# Altium PCB Rajesh_Jasti_17978253_Lab1.PcbDoc
Units mil, origin at the board's own origin, x right, y up, seen from the top; angles counter-clockwise.
Board outline 2500 x 2000 mil, 2 copper layers (Top Layer, Bottom Layer); 41 components, 29 nets, 143 pads, 6 vias.
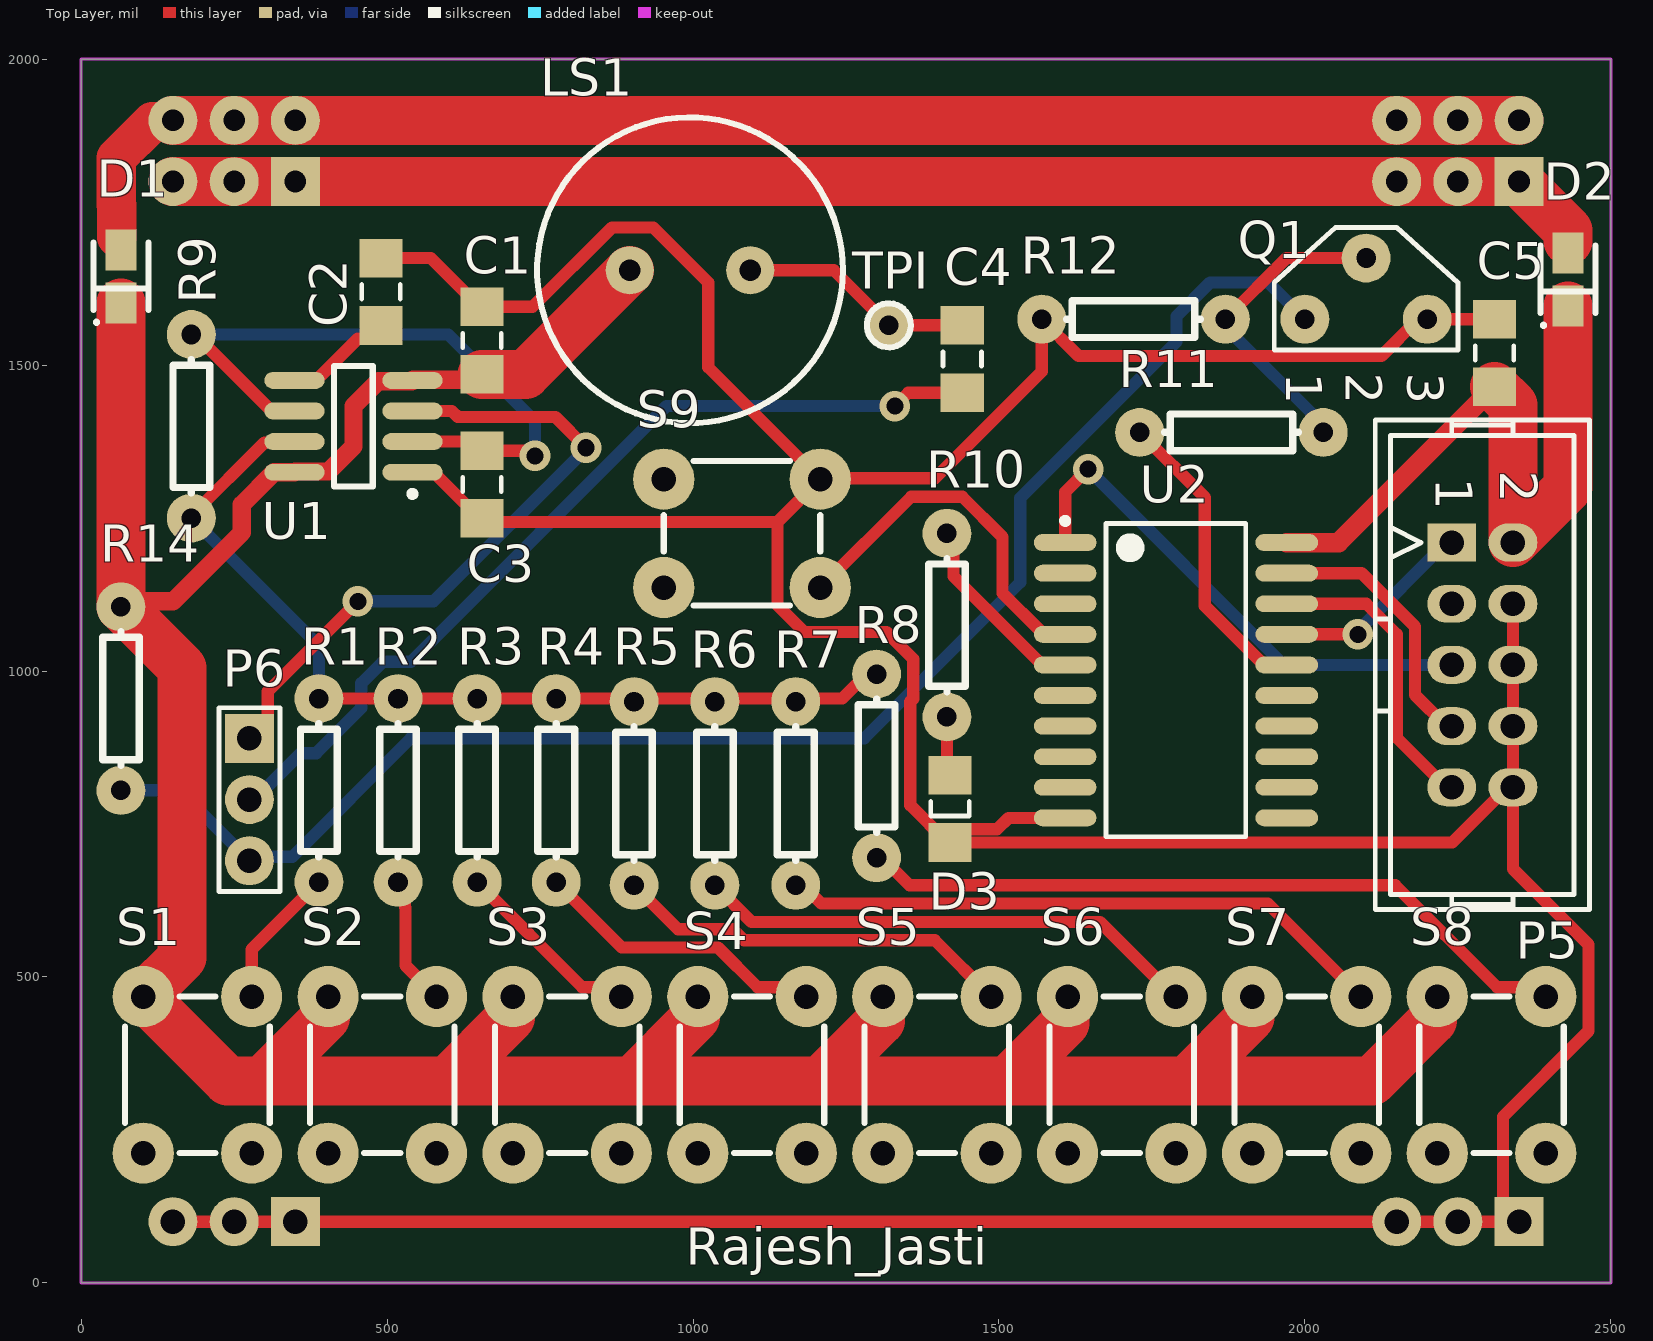
[diagram p0: Top Layer view]
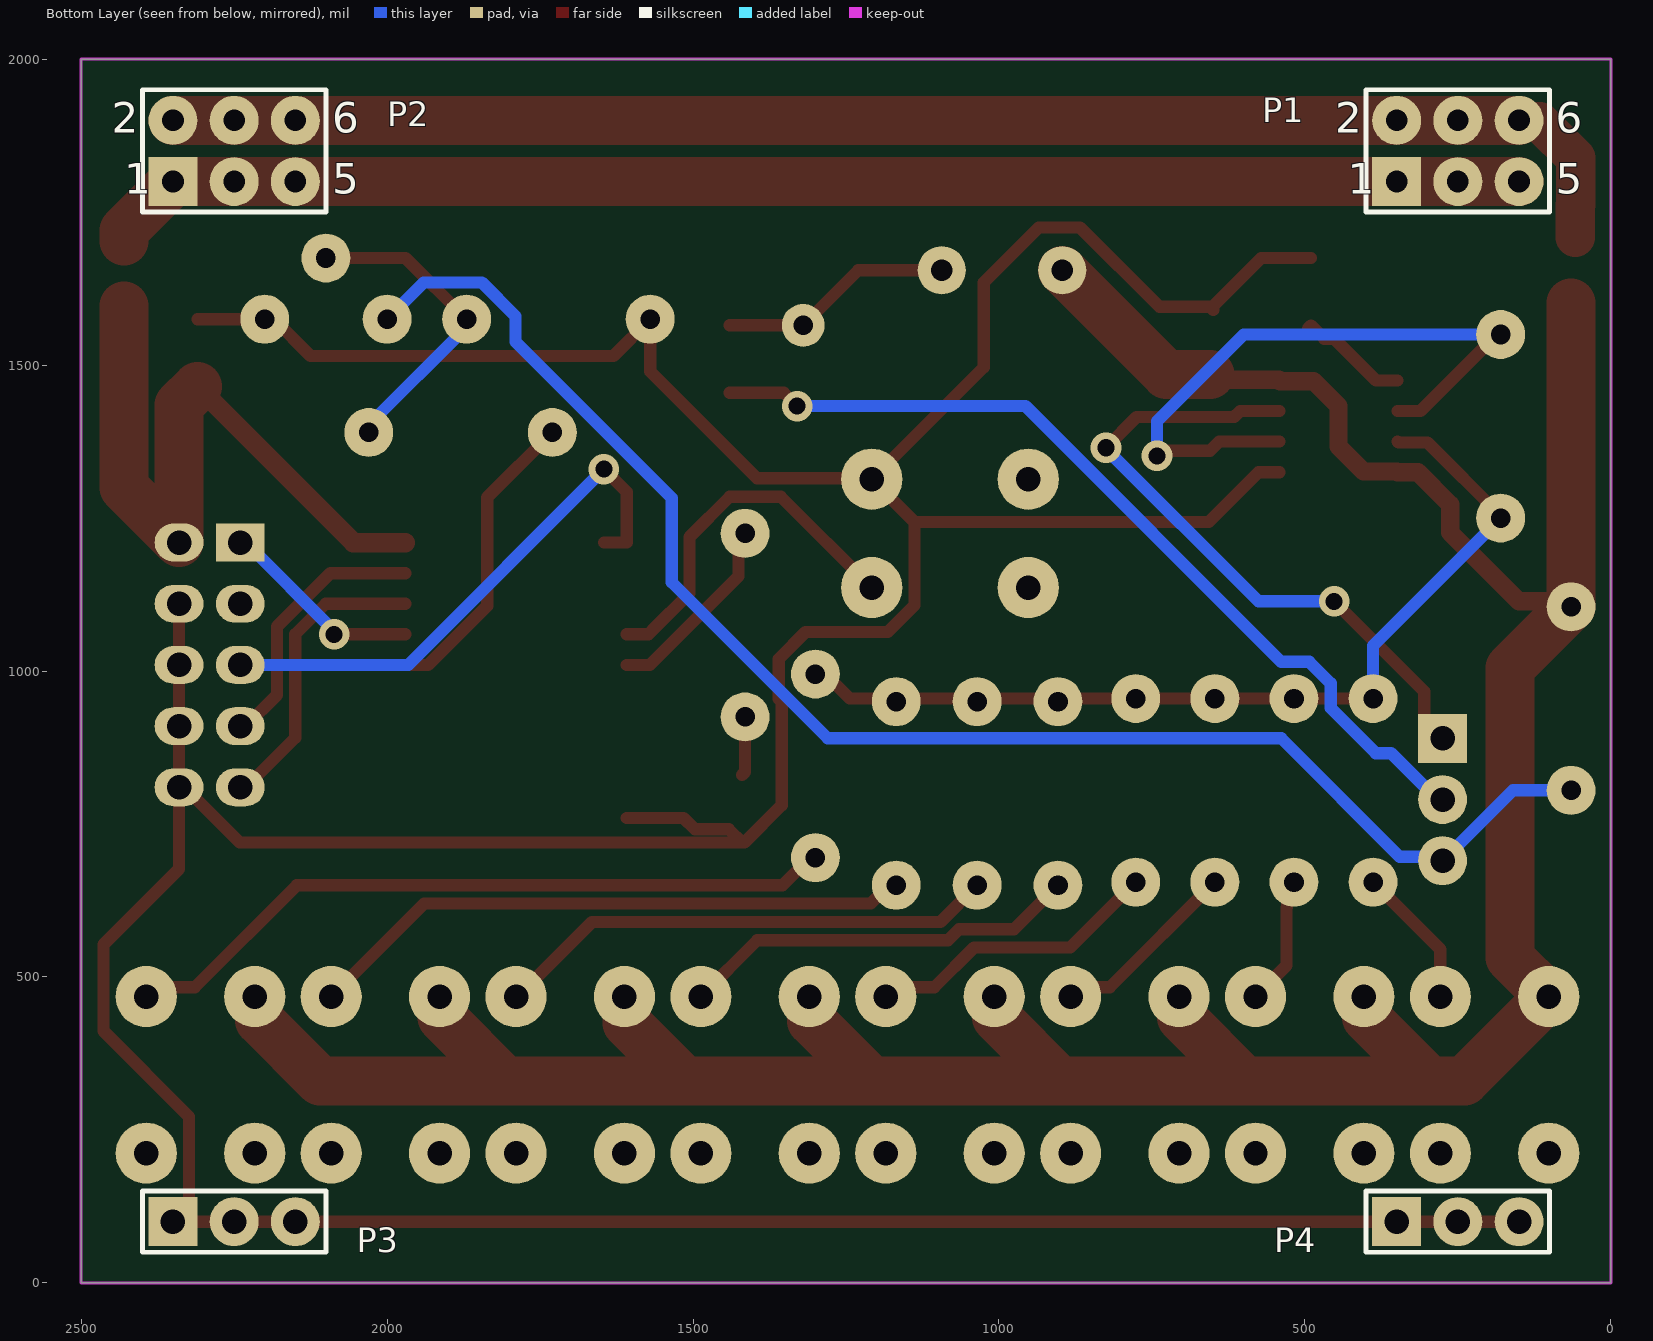
[diagram p1: Bottom Layer view, seen from below]
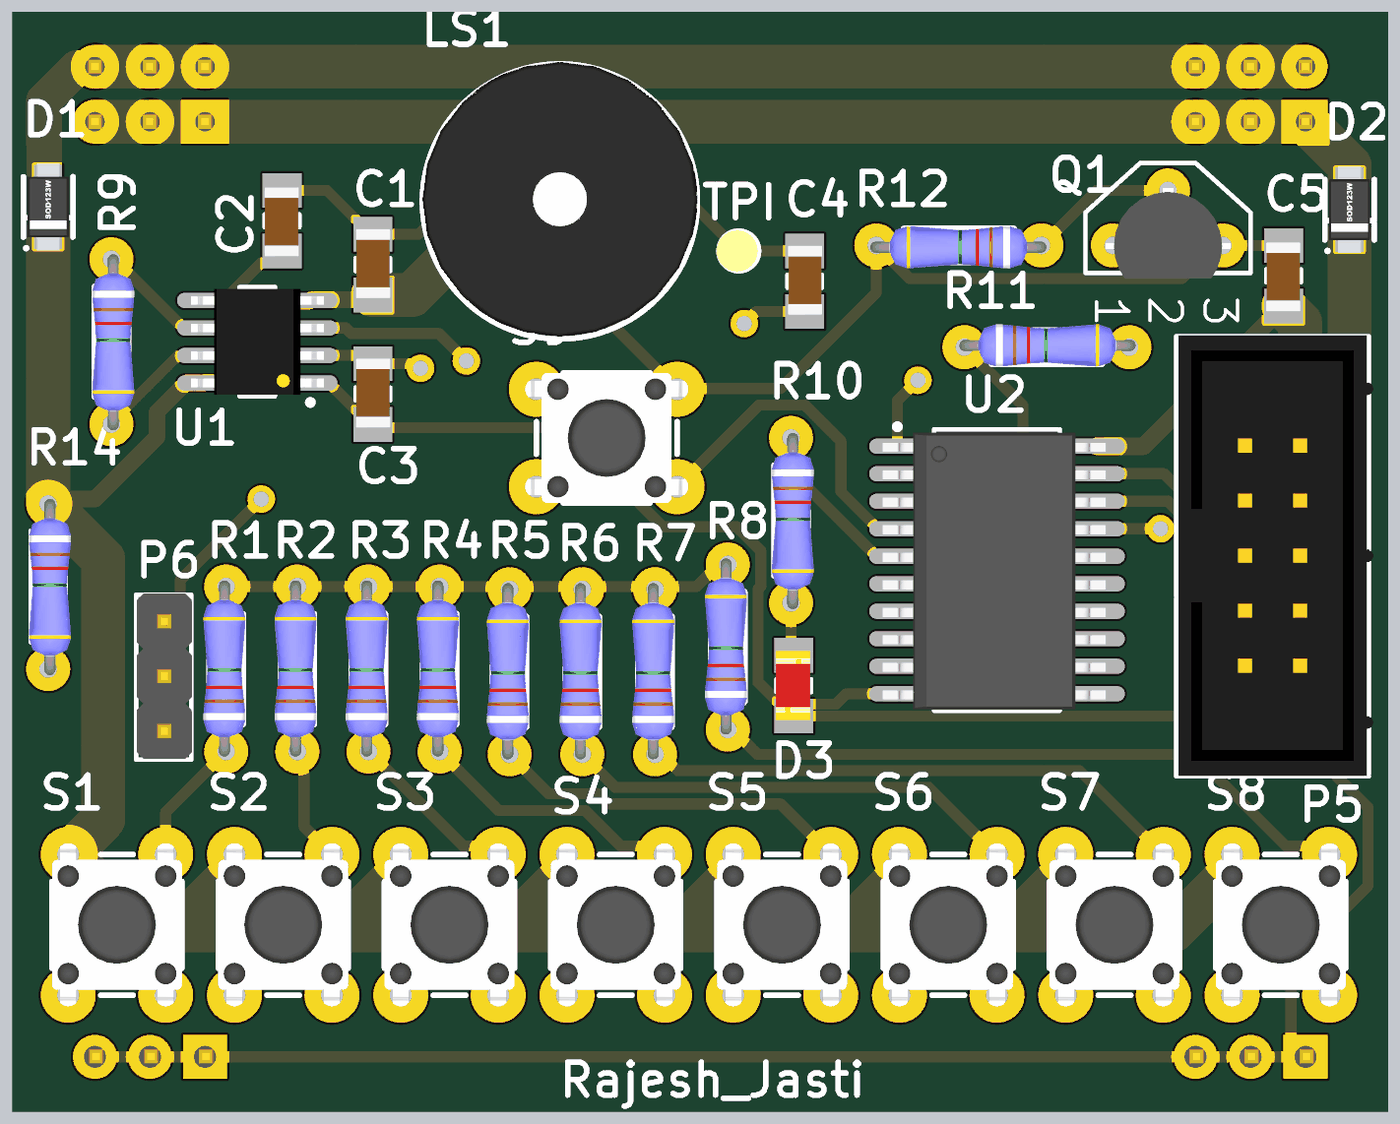
[diagram p2: 3D render of the assembled board from above, using the file's embedded part models]
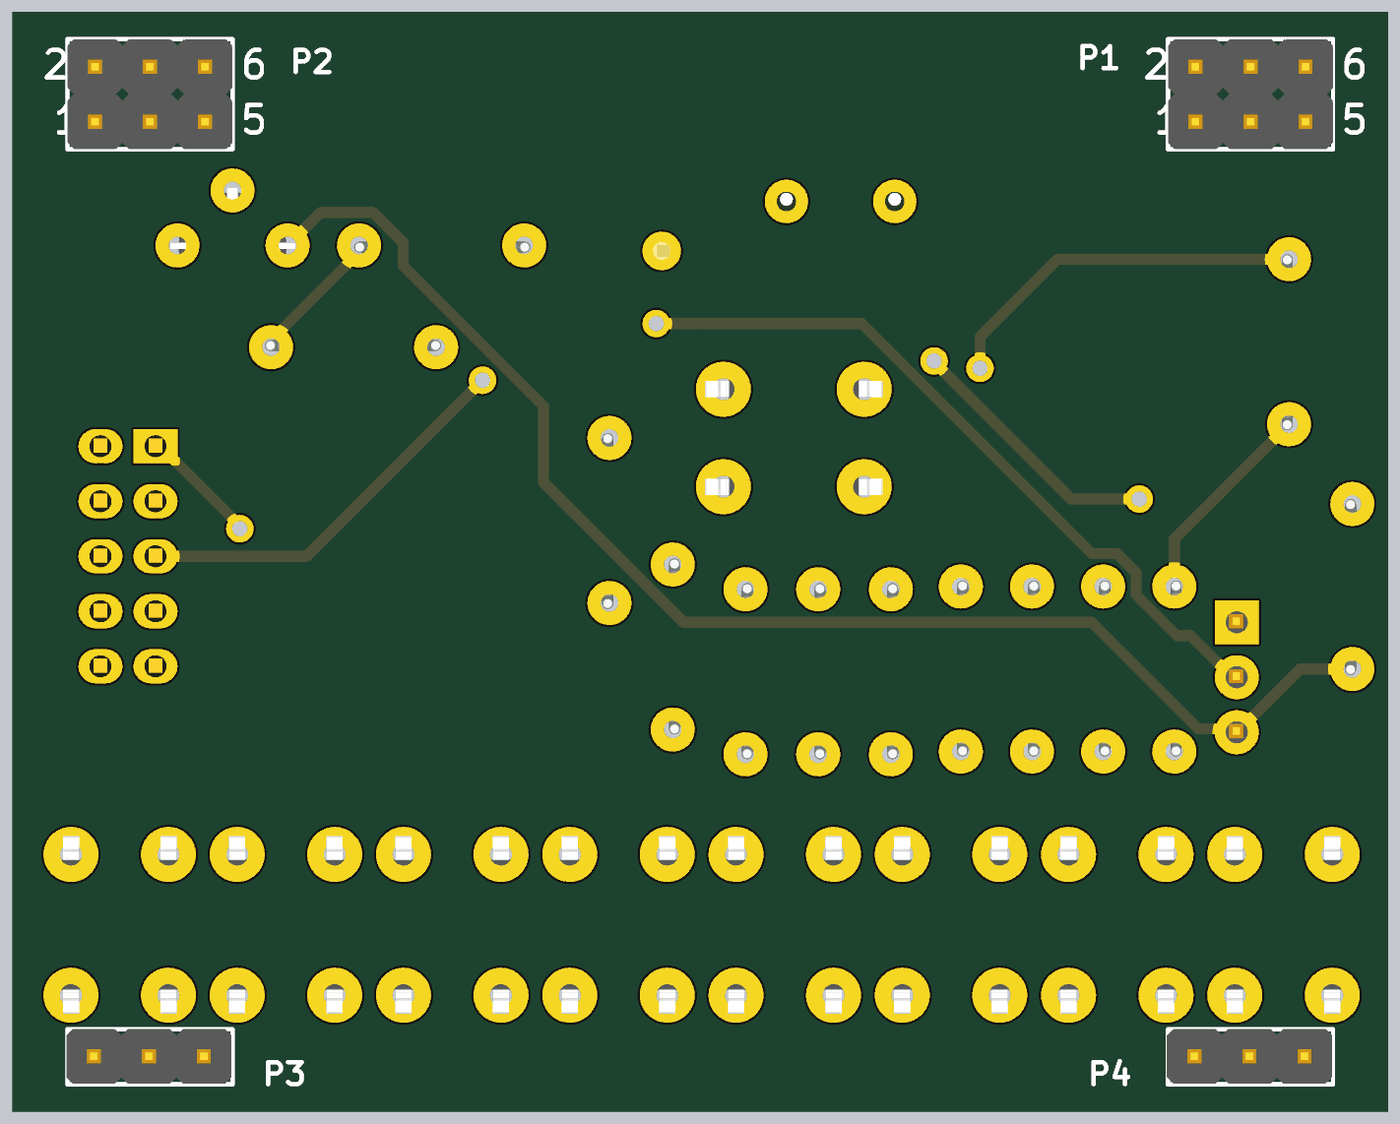
[diagram p3: 3D render of the assembled board from below, using the file's embedded part models]

## Layer stack, top to bottom
Top Solder: solder mask 0.4, Solder Resist, Dk 3.5
Top Layer: signal copper 1.4
Dielectric 1: dielectric 12.6, FR-4, Dk 4.8
Bottom Layer: signal copper 1.4
Bottom Solder: solder mask 0.4, Solder Resist, Dk 3.5

## Board outline
0,0 2500,0 2500,2000 0,2000

## Design rules (kind name [scope] priority, off if disabled: settings)
Clearance "Schematic Clearance Constraint_3" [InNet('+5')] p1: gap=20 ignorepadtopadclearanceinfootprint=FALSE
Clearance "Schematic Clearance Constraint_2" [InNet('+12')] p2: gap=20 ignorepadtopadclearanceinfootprint=FALSE
Clearance "Schematic Clearance Constraint_1" [InNet('+5Vin')] p3: gap=20 ignorepadtopadclearanceinfootprint=FALSE
Clearance "Schematic Clearance Constraint" [InNet('+12Vin')] p4: gap=20 ignorepadtopadclearanceinfootprint=FALSE
Clearance [All] p5: gap=10 ignorepadtopadclearanceinfootprint=FALSE
PolygonConnect [All] p1: connectstyle=Relief reliefconductorwidth=10 reliefentries=4 polygonreliefangle="90 Angle" airgapwidth=10
RoutingVias "Schematic Routing Via Style_3" [InNet('+12Vin')] p1: holewidth=28 width=50 viastyle="Through Hole" minholewidth=28 minwidth=50 maxholewidth=28 maxwidth=50
RoutingVias "Schematic Routing Via Style_2" [InNet('+12')] p2: holewidth=28 width=50 viastyle="Through Hole" minholewidth=28 minwidth=50 maxholewidth=28 maxwidth=50
RoutingVias "Schematic Routing Via Style_1" [InNet('+5Vin')] p3: holewidth=28 width=50 viastyle="Through Hole" minholewidth=28 minwidth=50 maxholewidth=28 maxwidth=50
RoutingVias "Schematic Routing Via Style" [InNet('+5')] p4: holewidth=28 width=50 viastyle="Through Hole" minholewidth=28 minwidth=50 maxholewidth=28 maxwidth=50
RoutingVias [All] p5: holewidth=28 width=50 viastyle="Through Hole" minholewidth=28 minwidth=50 maxholewidth=28 maxwidth=50
SilkToSilkClearance [All] p1 off: silktosilkclearance=10
SilkToSolderMaskClearance [IsPad] p1 off: minsilkscreentomaskgap=10 clearancetoexposedcopper=TRUE
SolderMaskExpansion [All] p1: expansion=4 istentingtop=FALSE
Width "Schematic Width Constraint_3" [InNet('+12Vin')] p1: maxlimit=80 minlimit=30 preferedwidth=80
Width "Schematic Width Constraint_2" [InNet('+5')] p2: maxlimit=80 minlimit=30 preferedwidth=80
Width "Schematic Width Constraint_1" [InNet('+5Vin')] p3: maxlimit=80 minlimit=30 preferedwidth=80
Width "Schematic Width Constraint" [InNet('+12')] p4: maxlimit=80 minlimit=30 preferedwidth=80
Width [All] p5: maxlimit=20 minlimit=20 preferedwidth=20
28 further rules are at their usual default settings.

## Components (designator, comment, footprint, x,y, rotation, side; value= is the part's Value field where it differs from the comment)
C1 "0.1uF" CAP_1206 655,1485 r90 top
C2 "10nF" CAP_1206 490,1675 r270 top
C3 "0.1uF" CAP_1206 655,1249.76 r90 top
C4 "4.7uF" CAP_1206 1439.97,1454.76 r90 top
C5 "0.1uF" CAP_1206 2310,1575 r270 top
D1 "PMEG2010ER" SOD123W 65,1645 r90 top
D2 "PMEG2010ER" SOD123W 2430,1640 r90 top
D3 "LED-RED" LED1206R 1420,830 r270 top
LS1 "Buzzer" Buzzer 995,1655 r0 top
P1 "+5V/+12V" HDR2X3_AUT 350,1800 r180 bottom locked
P2 "+5V/+12V" HDR2X3_AUT 2350,1800 r180 bottom locked
P3 "Gnd" HDR1X3_AUT 2350,100 r180 bottom locked
P4 "Gnd" HDR1X3_AUT 350,100 r180 bottom locked
P5 "ISP Header" FKV10SN_AUT 2240,1210 r270 top
P6 "Jumper" HDR1X3_AUT 275,890 r270 top
Q1 "BC546B" TO-92AUT 2100,1575 r270 top
R1 "14K" AXIAL-0.3AUT 388.54,955 r270 top
R2 "11K" AXIAL-0.3AUT 517.83,955 r270 top
R3 "8K2" AXIAL-0.3AUT 647.11,955 r270 top
R4 "7K" AXIAL-0.3AUT 776.4,955 r270 top
R5 "4K8" AXIAL-0.3AUT 903.54,950 r270 top
R6 "2K8" AXIAL-0.3AUT 1035.7,950 r270 top
R7 "980" AXIAL-0.3AUT 1167.85,950 r270 top
R8 "150" AXIAL-0.3AUT 1300,995 r270 top
R9 "6K8" AXIAL-0.3AUT 180,1250 r90 top
R10 "330R" AXIAL-0.3AUT 1415,925 r90 top
R11 "1K" AXIAL-0.3AUT 2030,1390 r180 top
R12 "10K" AXIAL-0.3AUT 1570,1575 r0 top
R14 "1K" AXIAL-0.3AUT 65,805 r90 top
S1 "FSM10JH" FSM10JH 190,340 r180 top
S2 "FSM10JH" FSM10JH 492.14,340 r180 top
S3 "FSM10JH" FSM10JH 794.29,340 r180 top
S4 "FSM10JH" FSM10JH 1096.43,340 r180 top
S5 "FSM10JH" FSM10JH 1398.57,340 r180 top
S6 "FSM10JH" FSM10JH 1700.71,340 r180 top
S7 "FSM10JH" FSM10JH 2002.86,340 r180 top
S8 "FSM10JH" FSM10JH 2305,340 r180 top
S9 "FSM10JH" FSM10JH 1080,1225 r90 top
TPI "Test Point" PAD1_AUT 1320,1565 r0 top
U1 "NE555D" SO8_M 445,1400 r90 top
U2 "ATtiny2313A-SU" 20S_M 1789.3,985 r0 top

## Footprints (in the part's own frame and the unit in brackets; to place one, negate y for a bottom-side part, rotate by r counter-clockwise, add the part's x,y. Pads: shape width x height; smd on the part's side, far side on the other; paste and mask are expansions set on the pad)
20S_M [mm] "SOIC, 20-Leads, Body 12.8x7.5mm, Pitch 1.27mm, IPC Low Density"
  oval 2.6x0.7 smd: 1(-4.6,5.715) 2(-4.6,4.445) 3(-4.6,3.175) 4(-4.6,1.905) 5(-4.6,0.635) 6(-4.6,-0.635) 7(-4.6,-1.905) 8(-4.6,-3.175) 9(-4.6,-4.445) 10(-4.6,-5.715) 11(4.6,-5.715) 12(4.6,-4.445) 13(4.6,-3.175) 14(4.6,-1.905) 15(4.6,-0.635) 16(4.6,0.635) 17(4.6,1.905) 18(4.6,3.175) 19(4.6,4.445) 20(4.6,5.715)
  silkscreen extent -4.72,-6.5 2.9,6.74, body extent -5.28,-6.45 5.02,6.35, height 2.65
AXIAL-0.3AUT [mil] "2 leads, Distance 300mil. For AUT Manufacture"
  round 80 hole 32: 1(0,0) 2(300,0)
  silkscreen extent 41,-30 259,30, body extent -11,-41 309,35, height 79
Buzzer [mm] "PIEZO BUZZER, Pitch 5mm, Dia 12.7mm"
  round 2 hole 0.9: 1(-2.5,0) 2(2.5,0)
  silkscreen extent -6.35,-6.35 6.35,6.35, body extent -6.35,-6.25 6.35,6.45, height 6.8
CAP_1206 [mm] "Body 3.2 x 1.6 mm (LxW typ)"
  rect 1.6x1.8 smd: 1(0,0) 2(2.8,0)
  silkscreen extent 1.1,-0.8 1.7,0.8, body extent -0.15,-0.81 3.05,0.79, height 1.6
FKV10SN_AUT [mil] "Box Headers; 10 Position; Dual Line; Pitch, 100 mil"
  rect 62x80 hole 40: 1(0,0)
  oval 62x80 hole 40: 2(0,100) 3(100,0) 4(100,100) 5(200,0) 6(200,100) 7(300,0) 8(300,100) 9(400,0) 10(400,100)
  silkscreen extent -200,-125 600,225, body extent -202,-121 599,233, height 355
FSM10JH [mm] "Switch, 4 Leads, Pitch 6.5x4.5mm"
  round 2.54 hole 1.016: 0(-2.25,3.25) 0(2.25,3.25) 1(-2.25,-3.25) 2(2.25,-3.25)
  silkscreen extent -3,-3.25 3,3.25, body extent -3,-4.11 3,4.11, height 7.4
HDR1X3_AUT [mil] "Connector; Header; 3 Position; Pitch 2.54mm, Straight"
  rect 80x80 hole 40: 1(0,0)
  round 80 hole 40: 2(100,0) 3(200,0)
  silkscreen extent -50,-50 250,50, body extent -52,-49 248,51, height 398
HDR2X3_AUT [mil] "Connector; Header; 3x2 Position"
  rect 80x80 hole 35.43: 1(0,0)
  round 80 hole 35.43: 2(0,100) 3(100,0) 4(100,100) 5(200,0) 6(200,100)
  silkscreen extent -50,-50 250,150, body extent -50,-50 250,150, height 398
LED1206R [mm] "SMD; Red LED; Body 3.2 x 1.6 mm"
  rect 1.6x1.8 smd: A(0,0) K(2.8,0)
  silkscreen extent 1.1,-0.8 1.7,0.8, body extent -0.2,-0.84 3,0.76, height 1.09
PAD1_AUT [mil] "Teminal Pad; 70 x 70 mil; Hole, 32mil"
  round 70 hole 32: 1(0,0)
  silkscreen extent -36,-36 36,36, body extent -40,-37 34,37, height 319
SO8_M [mm] "SOIC, 8-Leads, Body 4.9x3.9mm, Pitch 1.27mm, IPC Low Density"
  oval 0.7x2.5 smd: 1(-1.905,-2.45) 2(-0.635,-2.45) 3(0.635,-2.45) 4(1.905,-2.45) 5(1.905,2.45) 6(0.635,2.45) 7(-0.635,2.45) 8(-1.905,2.45)
  silkscreen extent -2.93,-2.58 2.5,0.8, body extent -2.44,-3.07 2.45,3.07, height 1.76
SOD123W [mm] "SOD, 2-Leads, Body 1.70x3.50mm, IPC Medium Density"
  rect 1.7x1.3 smd: 1(-1.1,0) 2(1.1,0)
  silkscreen extent -1.95,-1.14 1.4,1.14, body extent -2,-0.95 2,0.95, height 2.2
TO-92AUT [mil] "TO, Flat Index; Transistor; In-Line, Axial Leads; For AUT Manufacture"
  round 80 hole 32: 1(0,-100) 2(-100,0) 3(0,100)
  silkscreen extent -150,-150 50,150, body extent -105,-114 60,114, height 295

## Part data
C1 C2 C3 C4 C5: library part "CAPN 1206", "Non Polarized Capacitor, SMD, 1206"
D1 D2: "Schottky REC, 20V, 1A, 340mV, SMD SOD123W", Supplier Part Number 1=1907681, Supplier 1=Element14
D3: library part "SMD 1206 LED-RED", "RED LED, Case 1206", Supplier Part Number 1=8530017, Supplier 1=Farnell
LS1: "Magnetic Transducer Buzzer", Supplier Part Number 1=1756516, Supplier 1=Farnell
P1 P2: library part HDR3X2, "Header, 3-Pin, Dual row, 2.54mm Pitch, Straight", Supplier Part Number 1=9733574, Supplier 1=Farnell
P3 P4 P6: library part HDR1X3V, "Header, Plug, 2.54mm, 3 Pins, Straight", Supplier Part Number 1=9731083, Supplier 1=Farnell
P5: library part "Box Header 5X2/S", "Header, Box, 10 Way, 2.54mm, Straght", Supplier Part Number 1=8395918, Supplier 1=Farnell
Q1: "NPN Bipolar Transistor; 65V, 100mA", Supplier Part Number 1=512-BC546BTA, Supplier 1=Mouser
R1 R2 R3 R4 R5 R6 R7 R8 R9 R10 R11 R12 R14: library part "Resistor 1/8W", "Resistor, Through Hole, Pitch 300mil"
S1 S2 S3 S4 S5 S6 S7 S8 S9: "Switch, SPST, 0.05A, 12VDC", Supplier Part Number 1=1555986, Supplier 1=Farnell
TPI: library part Terminal1, "Terminal, Pad 70x70mil, Hole 32 mil"
U1: "General-Purpose Single Bipolar Timer, SMD", Supplier Part Number 1=9589880, Supplier 1=Farnell
U2: "8-bit AVR Microcontroller, 1.8-5.5V, 2KB Flash, 128 Bytes EEPROM, 128 Bytes SRAM", Supplier Part Number 1=2446406, Supplier 1=Farnell

## Via types
v1: diameter 50, hole 28, Top Layer to Bottom Layer, 6 vias

## Nets (pads, with @x,y where several pads share a name; then routed paths per layer and width w, separated by ;. In a path a pad name is that pad's centre, name@x,y a point inside that pad or via, vN(x,y) a via of type N, cw(c..) or ccw(c..) an arc to the next point about the centre after c; other vN are vias at no path point)
+5: C5.2 D2.1 P5.2 U2.20 | length 1138.6
  Top Layer w32: U2.20 2055.24,1210 2290.57,1445.33 2290.57,1449.27 2306.06,1464.76 C5.2
  Top Layer w80: C5.2 2340,1434.76 P5.2 2430,1300 D2.1
+5Vin: D2.2 P1.1 P1.3 P1.5 P2.1 P2.3 P2.5 | length 2330.1
  Top Layer w80: P1.5 P1.3 P1.1 1250,1800 P2.5 P2.3 P2.1 2430,1720 D2.2@2430,1702.99
+12: C1.1 D1.1 LS1.1 R14.2 S1.2 S2.2 S3.2 S4.2 S5.2 S6.2 S7.2 S8.2 U1.4 U1.8 | length 5662.4
  Top Layer w30: R14.2 73.93,1113.93 150,1113.93 262.7,1226.63 262.7,1272.15 315.55,1325 U1.8 349.76,1326.22 404.18,1326.22 445,1367.04 445,1432.96 485.82,1473.78 540.24,1473.78 U1.4 542.68,1476.22 646.22,1476.22 C1.1
  Top Layer w60: S8.2@2208.76,429.21 2208.76,460.3 S8.2
  Top Layer w80: D1.1 65,1582.01 R14.2 165,1005 165,531.54 S1.2 239.37,330 296.19,330 ; S2.2 399.73,464.13 399.73,433.54 296.19,330 ; C1.1 726.57,1485 LS1.1 ; S3.2 701.88,464.13 701.88,433.54 598.34,330 ; S4.2 1004.02,464.13 1004.02,433.54 900.48,330 ; S5.2 1306.16,464.13 1306.16,428.21 1207.95,330 ; S6.2 1608.3,464.13 1608.3,424.91 1513.4,330 ; S7.2 1910.45,464.13 1910.45,433.54 1806.91,330 ; S8.2@2208.76,429.21 2109.55,330 1806.91,330 ; 296.19,330 598.34,330 ; 598.34,330 900.48,330 ; 900.48,330 1207.95,330 ; 1207.95,330 1513.4,330 ; 1513.4,330 1806.91,330
+12Vin: D1.2 P1.2 P1.4 P1.6 P2.2 P2.4 P2.6 | length 2447.7
  Top Layer w65: D1.2@58.09,1708.96 58.09,1761.1 57.5,1761.69 57.5,1838.32 116.32,1897.13 147.13,1897.13 P1.6
  Top Layer w80: P1.6 P1.4 P1.2 P2.6 P2.4 P2.2
Analog: P6.1 U1.3 | length 1083.7
  Top Layer w20: P6.1 305,920 305,966.69 v1(452.24,1113.93) ; U1.3 605.64,1425 615.64,1415 775,1415 v1(825,1365)
  Bottom Layer w20: v1(452.24,1113.93) 575.9,1113.93 825,1363.03 v1(825,1365)
Digital: P6.3 Q1.1 R14.1 | length 2504.2
  Bottom Layer w20: R14.1 160,805 P6.3 281.31,696.31 345,696.31 538.69,890 1279.85,890 1534.93,1145.07 1534.93,1282.97 1790,1538.04 1790,1579.85 1845.15,1635 1940,1635 Q1.1
GND: C1.2 C2.1 C3.1 C5.1 D3.K P3.1 P3.2 P3.3 P4.1 P4.2 P4.3 P5.4 P5.6 P5.8 P5.10 Q1.3 R12.1 S9.2 U1.1 U2.10 | length 8322
  Top Layer w20: P4.3 P4.2 P4.1 P3.3 P3.2 P3.1 2323.58,126.42 2323.58,271.49 2463.58,411.49 2463.58,552.99 2340,676.57 P5.10 ; C2.1 571.3,1675 649.76,1596.54 649.76,1590 C1.2 737.82,1595.24 867.58,1725 935,1725 1025,1635 1025,1496.54 S9.2 ; U1.1 575.83,1325 657.24,1243.58 1137.95,1243.58 ; U2.10 1515.74,760 1497,741.26 1441.5,741.26 D3.K ; C5.1 2185,1575 2125,1515 1630,1515 R12.1 1570,1489.58 1395.42,1315 1209.37,1315 S9.2 ; P5.4 P5.6 P5.8 P5.10 ; 1137.95,1243.58 S9.2 ; 1137.95,1243.58 1137.95,1107.42 1181.74,1063.64 1316.22,1063.64 1360,1019.85 1360,954.85 1355,949.85 1355,780.83 1416.06,719.76 D3.K ; D3.K 2240.76,719.76 2331,810 P5.10
MISO: P5.9 U2.18 | length 493
  Top Layer w20: U2.18 2100.22,1110 2150,1060.22 2150,891 2231,810 P5.9
MOSI: P5.1 U2.17 | length 335
  Top Layer w20: U2.17 v1(2086.58,1060)
  Bottom Layer w20: v1(2086.58,1060) 2086.58,1065.58 2231,1210 P5.1
NetC2_2: C2.2 U1.5 | length 185.4
  Top Layer w20: U1.5 383.98,1475 452.24,1543.27 468.5,1543.27 C2.2 C2.2@494.76,1560
NetC3_2: C3.2 R9.2 U1.2 U1.6 | length 1098.9
  Top Layer w20: R9.2 186.06,1550 311.06,1425 U1.6 ; U1.2 640,1375 C3.2 725,1360 v1@733.33,1351.67
  Bottom Layer w20: R9.2 600,1550 741.67,1408.33 v1(741.67,1351.67)
NetC4_2: C4.2 LS1.2 TPI.1 | length 383.8
  Top Layer w20: LS1.2 1230,1655 TPI.1 C4.2
NetD3_A: D3.A R10.1 | length 97.1
  Top Layer w20: R10.1 1415,835 D3.A
NetQ1_2: Q1.2 R11.1 R12.2 | length 538.8
  Top Layer w20: R12.2 1970,1675 Q1.2 ; R11.1@2033.16,1393.16 R11.1 R11.1@2041.63,1390
  Bottom Layer w20: R12.2 1870,1562.5 2030,1402.5 R11.1
NetR1_1: R1.1 R2.1 R3.1 R4.1 R5.1 R6.1 R7.1 R8.1 R9.1 U1.7 | length 1532
  Top Layer w20: R9.1 180,1253.8 299.75,1373.55 347.1,1373.55 U1.7 ; R1.1 R2.1 R3.1 R4.1 1243.76,955 1283.76,995 R8.1
  Bottom Layer w20: R9.1 388.54,1041.46 R1.1
NetR1_2: R1.2 S1.1 | length 232.6
  Top Layer w20: S1.1 278.58,545.04 R1.2
NetR2_2: R2.2 S2.1 | length 213.1
  Top Layer w20: R2.2 529.31,643.52 529.31,613.97 530,613.28 530,518.68 S2.1
NetR3_2: R3.2 S3.1 | length 313.2
  Top Layer w20: R3.2 818.85,483.26 867.56,483.26 S3.1
NetR4_2: R4.2 S4.1 | length 486.1
  Top Layer w20: R4.2 883.45,547.95 1040.98,547.95 1105.68,483.26 1169.7,483.26 S4.1
NetR5_2: R5.2 S5.1 | length 659
  Top Layer w20: R5.2 975.59,577.95 1065.32,577.95 1083.27,560 1395.11,560 S5.1
NetR6_2: R6.2 S6.1 | length 829
  Top Layer w20: R6.2 1095.7,590 1665,590 1787.05,467.95 S6.1
NetR7_2: R7.2 S7.1 | length 999
  Top Layer w20: R7.2 1179.56,650 1209.56,620 1939.39,620 S7.1
NetR8_2: R8.2 S8.1 | length 1187.6
  Top Layer w20: R8.2 1308.99,695 1353.99,650 2147.51,650 2314.25,483.26 2378.28,483.26 S8.1
NetR10_2: R10.2 U2.5 | length 316.9
  Top Layer w20: R10.2 1425.79,1214.21 1425.79,1155 1570.79,1010 U2.5
NetR11_2: R11.2 U2.16 | length 501.5
  Top Layer w20: R11.2 1836.52,1283.48 1836.52,1106.48 1933,1010 U2.16
NetS9_1: S9.1 U2.4 | length 608.9
  Top Layer w20: S9.1 1356.54,1285 1439.85,1285 1505.8,1219.06 1505.8,1127.23 1567.01,1066.01 1567.01,1065.83 1572.84,1060 U2.4
RESET: P5.5 U2.1 | length 908.8
  Top Layer w20: U2.1@1645.6,1210 U2.1 1608.19,1292.6 v1(1645.6,1330) ; P5.5@2231,1010 P5.5
  Bottom Layer w20: v1(1645.6,1330) 1965.6,1010 P5.5
SCK: P5.7 U2.19 | length 438.6
  Top Layer w20: U2.19 2092.65,1160 2180,1072.65 2180,961 2231,910 P5.7
Speaker: C4.1 P6.2 | length 1464
  Top Layer w20: v1(1330,1432.96) 1351.8,1454.76 C4.1
  Bottom Layer w20: P6.2 283.28,790 359.1,865.81 384.21,865.81 457.83,939.43 457.83,979.85 492.98,1015 538.64,1015 956.6,1432.96 v1(1330,1432.96)
pads on no net: P5.3 S1.0 S2.0 S3.0 S4.0 S5.0 S6.0 S7.0 S8.0 S9.0 U2.2 U2.3 U2.6 U2.7 U2.8 U2.9 U2.11 U2.12 U2.13 U2.14 U2.15

## Keep-outs
Keep-Out Layer:
  the board outline again, w5

## Silkscreen, mask and mechanical layers (free items; w line width, h text height)
Top Overlay:
  text "Rajesh_Jasti" at 988.32,29.99 h60
Mechanical 1:
  the board outline again, w5

## Text inside footprints (layer, text, board x,y; h text height)
P1: Bottom Overlay "1" at 430,1780 h50; Bottom Overlay "2" at 450,1880 h50; Bottom Overlay "5" at 90,1780 h50; Bottom Overlay "6" at 90,1880 h50
P2: Bottom Overlay "1" at 2430,1780 h50; Bottom Overlay "2" at 2450,1880 h50; Bottom Overlay "5" at 2090,1780 h50; Bottom Overlay "6" at 2090,1880 h50
P5: Top Overlay "2" at 2319,1327 h60 r270; Top Overlay "1" at 2214,1316 h60 r270
Q1: Top Overlay "2" at 2067.05,1487.44 h59.05 r270; Top Overlay "1" at 1969.88,1487.44 h59.05 r270; Top Overlay "3" at 2167.05,1487.44 h59.05 r270